# Altium PCB main.PcbDoc (part 2 of 2)
Units mm, origin at the board's own origin, x right, y up, seen from the top; angles counter-clockwise.
Board outline 97 x 82.5 mm, 4 copper layers (Top Layer, Ground Layer, Power Layer, Bottom Layer), stack 1.591 mm thick; 87 components, 68 nets, 365 pads, 232 vias.
Unrouted connection lines stored in the file: 2.
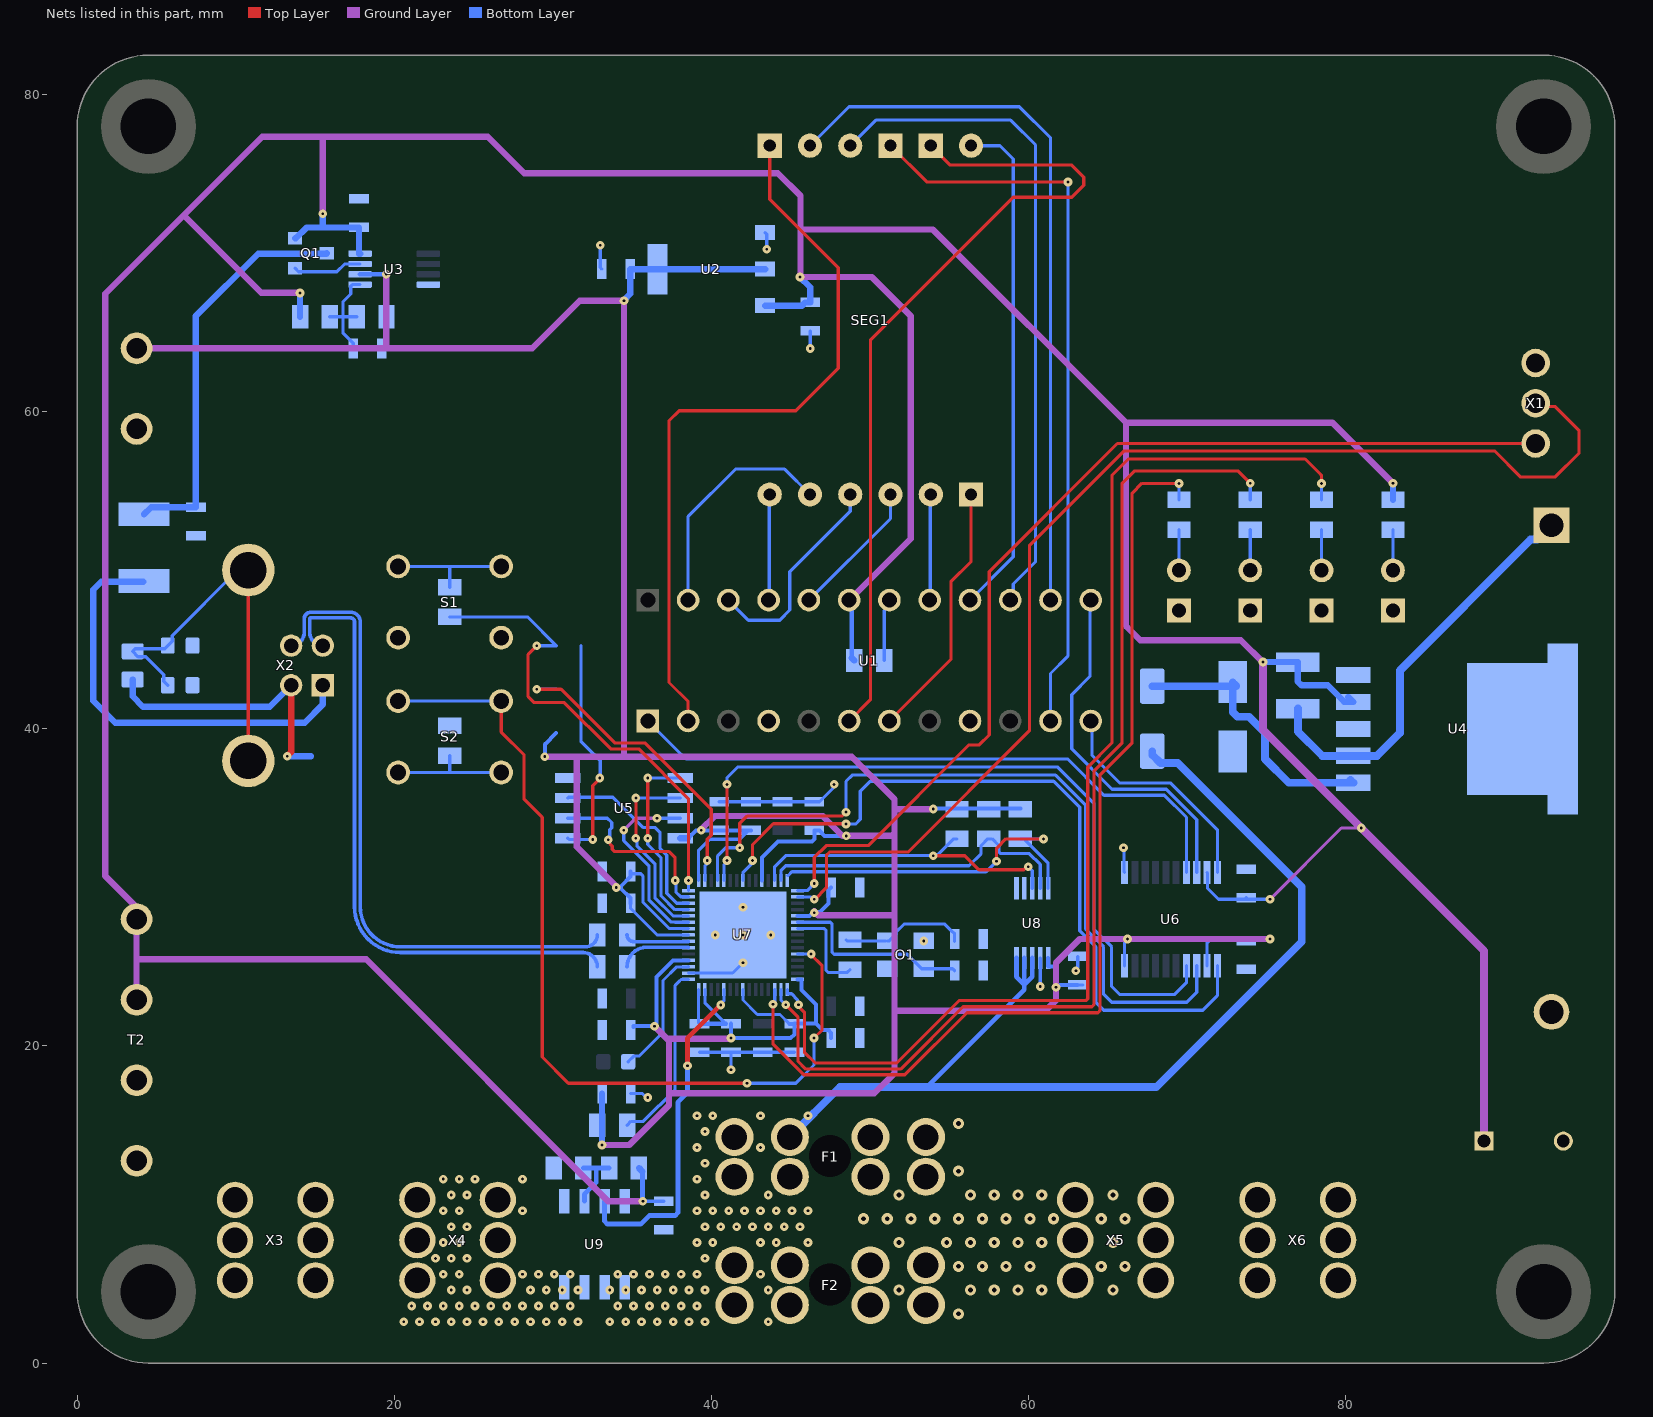
[diagram p4: the nets of this part, all layers, seen from the top]

## Via types
v1: diameter 0.55, hole 0.175, Top Layer to Bottom Layer, 193 vias
v2: diameter 0.7, hole 0.3, Top Layer to Bottom Layer, 39 vias

## Nets (pads, with @x,y where several pads share a name; then routed paths per layer and width w, separated by ;. In a path a pad name is that pad's centre, name@x,y a point inside that pad or via, vN(x,y) a via of type N, cw(c..) or ccw(c..) an arc to the next point about the centre after c; other vN are vias at no path point) (continued)
+3V3: C3.2 C8.2 C10.2 C11.2 C12.2 C14.2 C15.2 C17.1 C18.1 C22.2 C24.2 C25.1 C26.2 C27.2 C28.2 J3.1 R10.2 R11.2 R12.2 R16.2 T1.1 U2.2 U3.6 U5.8 U6.2 U6.10 U7.1 U7.11 U7.20 U7.30 U7.38 U7.44 U7.45 U7.49 U7.53 U7.54 U8.6 | length 290.9
  Ground Layer w0.4: T1.1@4.5,64 19.515,64 ; v1(19.5,68.675) 19.5,64.015 19.515,64 ; v1(29.5,38.25) 31.512,38.25 ; v1(33.11,13.75) 34.832,13.75 37.338,16.256 37.338,17.018 ; v1(34.01,30) 34.01,30.068 31.512,32.565 31.512,38.25 ; v1(36.422,21.249) 37.338,20.333 ; 37.338,20.447 37.338,17.018 ; 37.375,20.447 41.197,20.447 v1(41.25,20.5) ; v1@39.342,33.627 40.215,34.5 47.025,34.5 48.275,33.25 v1(48.514,33.25) 51.411,33.25 51.562,33.401 51.562,28.25 ; v1@46.491,28.491 46.732,28.25 51.562,28.25 ; 51.562,33.5 51.562,34.94 ; v1(54,34.94) 51.562,34.94 ; v1(75.25,26.75) v1(66.25,26.75) 63.25,26.75 61.75,25.25 v1(61.75,23.7) 61.75,22.888 61.087,22.225 51.562,22.225 ; 19.515,64 28.71,64 31.71,67 v1(34.5,67) 34.5,38.25 ; 31.512,38.25 34.5,38.25 ; 34.5,38.25 48.872,38.25 51.562,35.56 51.562,34.94 ; 37.338,17.018 50.292,17.018 51.562,18.288 51.562,22.225 ; 51.562,22.225 51.562,28.25
  Bottom Layer w0.2: C15.2@34.91,29 34.91,28.675 36.585,27 U7.53@38.56,27 ; C12.2@34.91,31 35.049,30.861 35.555,30.861 35.687,30.729 35.687,29.083 37.37,27.4 U7.54@38.56,27.4 ; C25.1@39.2,21.45 U7.45@39.2,23.56 ; U7.1@39.2,30.44 39.2,32.342 39.898,33.04 41.793,33.04 C10.2@42.353,33.6 ; U7.44@39.6,23.56 39.6,22.725 C24.2@40.925,21.4 ; U7.38@42,23.56 42,22.897 42.91,21.987 44.338,21.987 C22.2@44.93,21.395 ; C18.1@63.119,23.85 C18.1@63.444,23.85 ; U6.10@66.075,25.062 66.075,26.534 66.25,26.709 v1(66.25,26.75) ; U6.2@71.275,25.062 71.275,26.516 71.509,26.75 C17.1@73.734,26.75 ; C17.1@73.75,26.65 73.85,26.75 v1(75.25,26.75)
  Bottom Layer w0.25: U8.6@61.25,25.55 61.25,25.048 61.275,25.023 61.604,25.023 61.75,24.877 v1(61.75,23.7) 61.831,23.7 61.981,23.85 C18.1@63.119,23.85
  Bottom Layer w0.254: v1(29.5,38.25) 29.5,39.03 J3.1@30.22,39.75 ; v1(34.01,30) 34.067,29.943 34.292,29.943 34.91,29.325 C15.2@34.91,29 ; 34.292,30.057 34.91,30.675 C12.2@34.91,31 ; C26.2@35.083,21.205 35.083,21.249 v1(36.422,21.249) 36.422,21.329 36.536,21.443 36.536,24.344 37.592,25.4 U7.49@38.56,25.4 ; U5.8@38.525,33.095 39.031,33.6 v1(39.37,33.6) C11.2@40.5,33.6 C10.2@42.207,33.6 ; C25.1@39.25,21.4 C24.2@40.925,21.4 ; C24.2@41.25,21.4 v1(41.25,20.5) 45.011,20.5 45.245,20.734 45.245,21.395 C22.2@44.93,21.395 ; C10.2@42.034,33.427 C10.2@42.207,33.6 ; C10.2@42.5,33.6 42.353,33.6 C10.2@42.207,33.6 ; U7.11@43.2,30.44 43.2,31.897 44.196,32.893 46.351,32.893 46.5,33.042 C8.2@46.5,33.6 46.825,33.6 46.998,33.427 46.998,33.399 47.147,33.25 v1(48.514,33.25) ; C22.2@45.25,21.4 45.256,21.406 46.609,21.406 ; U7.30@45.44,24.2 45.684,24.2 45.701,24.183 45.701,23.514 46.609,22.606 46.609,21.406 ; U7.20@45.44,28.2 46.2,28.2 v1@46.491,28.491 ; v1(46.5,28.4) 46.552,28.452 46.867,28.452 47.392,28.977 47.392,29.827 C14.2@47.565,30 ; C27.2@47.565,20.5 47.565,20.825 47.392,20.998 47.017,20.998 46.609,21.406 ; v1@54,34.992 R10.2@59.5,34.992
  Bottom Layer w0.3: U3.6@17.85,68.675 v1(19.5,68.675)
  Bottom Layer w0.4: v1(33.11,13.75) C28.2@33.11,17 ; v1(34.5,67) 34.5,67.041 34.9,67.441 C3.2@34.9,69 U2.2@36.6,69 U2.2@43.4,69 ; U5.8@38.05,33.095 U5.8@38.525,33.095
+5V: C1.1 C2.2 C4.2 C13.1 C29.2 L2.2 Q1.2 R2.2 R3.1 R8.1 R17.2 T2.1 T2.2 U1.19 U2.3 U3.8 U4.4 U6.19 U9.8 | length 326.2
  Ground Layer w0.2: v1(75.25,29.25) 79.75,33.75 v1(81,33.75)
  Ground Layer w0.4: T2.2@3.75,22.92 3.75,25.46 ; T2.1@3.75,28 3.75,25.46 ; T2.1@4.5,28 1.778,30.722 1.778,67.437 6.731,72.39 ; v1(14.06,67.5) 11.621,67.5 6.731,72.39 ; v1(15.5,72.5) 15.5,77.222 15.621,77.343 ; v1(35.687,10.204) 33.484,10.204 18.228,25.46 3.75,25.46 ; v1(45.6,68.5) 50.118,68.5 52.578,66.04 52.578,51.998 U1.19@48.7,48.12 ; v1@45.627,68.527 45.627,71.501 ; v1@74.803,44.197 73.407,45.593 67.056,45.593 66.167,46.482 66.167,59.309 ; v1(83,55.5) 79.191,59.309 66.167,59.309 ; 6.731,72.39 11.684,77.343 15.621,77.343 ; 15.621,77.343 25.908,77.343 28.194,75.057 44.196,75.057 45.627,73.626 45.627,71.501 ; 45.627,71.501 53.975,71.501 66.167,59.309
  Ground Layer w0.5: v1(74.803,44.216) 74.803,39.947 v1(81,33.75) 88.75,26 C1.1@88.75,14
  Bottom Layer w0.2: v1(35.687,10.204) 36.996,10.204 C29.2@37,10.2 ; U6.19@71.275,30.938 71.3,30.913 71.3,29.95 72,29.25 C13.1@73.811,29.25 ; C13.1@73.75,29.35 73.85,29.25 v1(75.25,29.25)
  Bottom Layer w0.3: U9.8@34.544,10.204 v1(35.687,10.204) ; v1@35.658,10.233 R17.2@35.658,12.082 ; R8.1@48.865,44.474 U1.19@48.865,47.955
  Bottom Layer w0.4: Q1.2@13.75,70.95 13.8,70.95 14.478,71.628 15.4,71.628 ; R2.2@14.06,66 v1(14.06,67.5) ; v1(15.5,72.5) 15.5,71.728 15.4,71.628 ; U3.8@17.85,69.975 17.78,69.975 C2.2@17.78,71.628 15.4,71.628 ; R17.2@35.44,12.3 R17.2@35.658,12.082 ; U2.3@43.4,66.7 45.725,66.7 45.925,66.9 C4.2@46.25,66.9 46.25,67.85 v1(45.6,68.5) ; R8.1@48.865,44.474 R8.1@49.03,44.31 ; v1(74.803,44.216) L2.2@77,44.216 77,42.984 77.234,42.75 78.88,42.75 79.93,41.7 U4.4@80.5,41.7 U4.4@80.19,42.01 ; R3.1@83,54.44 v1(83,55.5)
Battery+: D6.2 F1.1 F2.1 U8.8 U8.9 U8.10 U9.1 U9.2 | length 68.5
  Bottom Layer w0.3: 53.53,17.335 53.594,17.399 59.75,23.555 59.75,23.876 ; U8.10@59.25,25.55 59.25,24.376 59.75,23.876 ; U8.9@59.75,25.55 59.75,23.876 ; U8.8@60.25,25.55 60.25,24.376 59.75,23.876
  Bottom Layer w0.5: F1.1@44.96,14.25 48.109,17.399 53.594,17.399 68.072,17.399 77.25,26.577 77.25,30.026 69.426,37.85 68.332,37.85 67.817,38.365 D6.2@67.817,38.59
  other v1: 33.6,2.6 34.6,2.6 35.6,2.6 36.6,2.6 37.6,2.6 38.6,2.6 39.6,2.6 43.6,2.6 34.1,3.6 35.1,3.6 36.1,3.6 37.1,3.6 38.1,3.6 39.1,3.6 33.6,4.6 34.6,4.6 35.6,4.6 36.6,4.6 37.6,4.6 38.6,4.6 39.6,4.6 43.6,4.6 34.1,5.6 35.1,5.6 36.1,5.6 37.1,5.6 38.1,5.6 39.1,5.6 43.1,5.6 39.6,6.6 39.1,7.6 40.1,7.6 43.1,7.6 44.1,7.6 46.1,7.6 39.6,8.6 40.6,8.6 41.6,8.6 42.6,8.6 43.6,8.6 44.6,8.6 45.6,8.6 39.1,9.6 40.1,9.6 41.1,9.6 42.1,9.6 43.1,9.6 44.1,9.6 45.1,9.6 46.1,9.6 39.6,10.6 43.6,10.6 39.1,11.6 39.6,12.6 39.1,13.6 43.1,13.6 39.6,14.6 39.1,15.6 40.1,15.6 43.1,15.6 46.1,15.6
"Current Sense": U7.41 U9.7 | length 21.5
  Top Layer w0.3: v1(38.5,18.75) 38.5,20.484 v1(40.6,22.584)
  Bottom Layer w0.2: v1@40.6,22.652 40.8,22.852 U7.41@40.8,23.56
  Bottom Layer w0.3: U9.7@33.274,10.204 33.274,8.939 33.45,8.763 35.56,8.763 36.097,9.3 37.724,9.3 37.9,9.476 37.9,16.437 38.5,17.037 v1(38.5,18.75)
D_DIG_0: SEG1.12 U1.2 | length 47.3
  Top Layer w0.2: U1.2@38.54,40.5 38.54,41.724 37.338,42.926 37.338,59.436 37.973,60.071 45.339,60.071 48.006,62.738 48.006,69.089 43.688,73.407 SEG1.12@43.688,76.786
D_DIG_1: SEG1.9 U1.11 | length 46.6
  Top Layer w0.203: SEG1.9@51.308,76.786 53.594,74.5 v1(62.5,74.5)
  Bottom Layer w0.203: U1.11@61.4,40.5 61.4,43.493 62.5,44.593 v1(62.5,74.5)
D_DIG_2: SEG1.8 U1.6 | length 53.2
  Top Layer w0.2: U1.6@48.7,40.5 50.038,41.838 50.038,64.516 59.055,73.533 62.738,73.533 63.5,74.295 63.5,74.803 62.738,75.565 55.069,75.565 SEG1.8@53.848,76.786
  Bottom Layer w0.203: SEG1.8@53.848,76.786 SEG1.8@53.975,76.659
D_DIG_3: SEG1.6 U1.7 | length 16.4
  Top Layer w0.2: U1.7@51.24,40.5 55.118,44.378 55.118,49.276 56.388,50.546 SEG1.6@56.388,54.786
D_ISET: R8.2 U1.18 | length 3.9
  Bottom Layer w0.203: R8.2@50.91,44.31 50.91,47.459 51.24,47.789 U1.18@51.24,48.12
"D_LOAD (C\S\\)": U6.1 U7.8 | length 49.2
  Top Layer w0.203: v1(42.6,31.7) 42.6,32.694 43.921,34.015 48.48,34.015 v1@48.498,33.998
  Bottom Layer w0.203: U7.8@42,30.44 42.008,30.448 42.008,30.959 v1@42.547,31.498 ; v1(48.5,34) 49.113,34 49.403,34.29 49.403,36.068 50.038,36.703 61.595,36.703 63.246,35.052 63.246,27.254 64.25,26.25 64.25,22.75 64.75,22.25 71,22.25 71.925,23.175 U6.1@71.925,25.062
"D_LOAD (C\S\\) 5V": U1.12 U6.20 | length 14.7
  Bottom Layer w0.2: U1.12@63.94,40.5 64.008,40.432 64.008,38.354 65.786,36.576 68.987,36.576 71.925,33.638 U6.20@71.925,30.938
D_N: R15.2 X2.2 Z2.2 | length 40.6
  Bottom Layer w0.23: X2.2@15.5,45.25 cw(c15.5,46.071) 14.679,46.071 14.679,46.929 cw(c14.75,46.929) 14.75,47 17.25,47 cw(c17.25,46.75) 17.5,46.75 17.5,28.79 ccw(c20.397,28.79) 20.397,25.893 31.917,25.893 cw(c31.917,25) R15.2@32.81,25
D_P: R13.2 X2.3 Z1.2 | length 41.1
  Bottom Layer w0.23: X2.3@13.5,45.25 ccw(c13.5,46.071) 14.321,46.071 14.321,46.929 cw(c14.75,46.929) 14.75,47.357 17.25,47.357 cw(c17.25,46.75) 17.857,46.75 17.857,28.79 ccw(c20.397,28.79) 20.397,26.25 32.06,26.25 ccw(c32.06,27) R13.2@32.81,27
D_Seg_A: SEG1.11 U1.14 | length 46.2
  Bottom Layer w0.203: SEG1.11@46.228,76.786 48.69,79.248 59.436,79.248 61.4,77.284 U1.14@61.4,48.12
D_Seg_B: SEG1.7 U1.16 | length 32
  Bottom Layer w0.203: U1.16@56.32,48.12 59.055,50.855 59.055,75.946 58.215,76.786 SEG1.7@56.388,76.786
D_Seg_C: SEG1.4 U1.20 | length 8.8
  Bottom Layer w0.203: U1.20@46.16,48.12 51.308,53.268 SEG1.4@51.308,54.786
D_Seg_D: SEG1.2 U1.23 | length 14.9
  Bottom Layer w0.203: U1.23@38.54,48.12 38.54,53.399 41.529,56.388 44.626,56.388 SEG1.2@46.228,54.786
D_Seg_DP: SEG1.3 U1.22 | length 13.5
  Bottom Layer w0.203: U1.22@41.08,48.12 42.345,46.855 44.315,46.855 44.958,47.498 44.958,49.911 48.766,53.719 48.766,54.784 SEG1.3@48.768,54.786
D_Seg_E: SEG1.1 U1.21 | length 6.7
  Bottom Layer w0.203: U1.21@43.62,48.12 43.654,48.154 43.654,54.752 SEG1.1@43.688,54.786
D_Seg_F: SEG1.10 U1.15 | length 42.4
  Bottom Layer w0.203: SEG1.10@48.768,76.786 50.384,78.402 58.885,78.402 60.452,76.835 60.452,50.546 59.043,49.137 59.043,48.303 U1.15@58.86,48.12
D_Seg_G: SEG1.5 U1.17 | length 6.7
  Bottom Layer w0.203: U1.17@53.78,48.12 53.814,48.154 53.814,54.752 SEG1.5@53.848,54.786
DX_N: R15.1 U7.51 | length 4.6
  Bottom Layer w0.23: R15.1@34.69,25 cw(c35.911,25) 35.911,26.221 38.539,26.221 cw(c38.539,26.2) U7.51@38.56,26.2
DX_P: R13.1 U7.52 | length 4.1
  Bottom Layer w0.23: R13.1@34.69,27 ccw(c35.112,27) 35.112,26.579 38.539,26.579 ccw(c38.539,26.6) U7.52@38.56,26.6
"Flash SS": J1.2 J2.2 J3.2 U5.1 | length 14.5
  Top Layer w0.203: v1(32.52,33.02) 32.52,36.421 32.963,36.864 v1(32.963,36.905)
  Bottom Layer w0.203: U5.1@30.95,33.095 31.025,33.02 v1(32.52,33.02) ; J1.2@31.78,45.25 J2.2@31.78,42.5 J3.2@31.78,39.75 31.78,39.22 33,38 33,36.942 v1(32.963,36.905)
GND: C1.2 C2.1 C3.1 C4.1 C5.1 C6.2 C7.2 C8.1 C9.1 C10.1 C11.1 C12.1 C13.2 C14.1 C15.1 C16.1 C17.2 C18.2 C19.1 C20.1 C21.1 C22.1 C23.1 C24.1 C25.2 C26.1 C27.1 C28.1 C29.1 D1.2 D2.2 D3.2 D4.2 D5.2 J4.1 O1.2 O1.4 R1.1 R9.2 R18.1 S1.3 S1.4 T1.2 T2.3 T2.4 U1.4 U1.9 U2.1 U3.4 U4.3 U4.5 U4.6 U5.4 U6.11 U7.47 U7.61 U8.1 U8.2 U8.7 U9.5 X1.3 X3.1 X6.1 | length 27.9
  Bottom Layer w0.2: v1(33,70.5) 33,69.1 C3.1@33.1,69 ; C28.1@34.91,17 35.655,17 35.905,16.75 v1(36,16.75) ; U7.47@38.56,24.6 41.35,24.6 v1(42,25.25) ; C25.2@39.25,19.6 C24.1@41.25,19.6 ; C11.1@40.5,35.4 C10.1@42.5,35.4 C9.1@44.5,35.4 C8.1@46.5,35.4 46.825,35.4 47.683,36.258 47.683,36.433 v1(47.75,36.5) ; v1(41.25,18.5) C24.1@41.25,19.6 ; U2.1@43.4,71.3 43.5,71.2 v1(43.5,70.25) ; C22.1@45.25,19.6 C23.1@43.25,19.6 C24.1@41.25,19.6 ; v1(46.25,64) C4.1@46.25,65.1 ; v1(60.75,23.75) U8.7@60.75,25.55 ; v1(63,24.75) 63,24.845 63.119,24.964 C18.2@63.119,25.65 ; v1(66,32.5) 66.037,32.463 66.037,30.976 U6.11@66.075,30.938
  other v1: 53.4,26.625 40.25,27 42,27 43.75,27 42,28.75
GPIO0: J2.1 U7.2 | length 19.8
  Top Layer w0.203: v1(29,42.5) 30.525,42.5 33.909,39.116 35.814,39.116 40,34.93 40,33.287 39.751,33.038 v1(39.751,31.7)
  Bottom Layer w0.203: v1(29,42.5) J2.1@30.22,42.5 ; U7.2@39.6,30.44 39.6,31.349 v1@39.751,31.5
"Green LED": R4.1 U7.31 | length 73.7
  Top Layer w0.203: v1@45.4,22.6 45.875,22.125 45.875,19.6 46.552,18.923 51.689,18.923 55.626,22.86 63.635,22.86 63.754,22.979 63.754,37.592 65.278,39.116 65.278,56.007 66.294,57.023 77.456,57.023 78.367,56.112 78.5,55.979 v1(78.5,55.485)
  Bottom Layer w0.2: R4.1@78.5,54.44 v1(78.5,55.485)
  Bottom Layer w0.203: U7.31@44.808,23.552 44.808,23.293 45.067,23.293 45.434,22.926 45.434,22.666 v1(45.5,22.6)
LM2576_OUTPUT: D1.1 L2.1 U4.2 | length 26.4
  Bottom Layer w0.203: D1.1@92.088,51.938 D1.1@93,52.85
  Bottom Layer w0.5: L2.1@77,41.284 77,39.84 78.54,38.3 U4.2@80.5,38.3 81.988,38.3 83.439,39.751 83.439,43.688 91.689,51.938 D1.1@92.088,51.938
LM2576_VIN: C7.1 D6.1 U4.1 | length 17.4
  Bottom Layer w0.5: D6.1@67.817,42.69 C7.1@72.62,42.69 ; C7.1@72.897,42.699 72.897,41.06 73.19,40.767 73.914,40.767 74.93,39.751 74.93,38.1 76.43,36.6 U4.1@80.5,36.6 U4.1@80.313,36.787 ; C7.1@72.897,42.917 73.006,42.808 C7.1@73.115,42.699
Load+: U9.3 U9.4 X4.1
  other v1: 20.6,2.6 21.6,2.6 22.6,2.6 23.6,2.6 24.6,2.6 25.6,2.6 26.6,2.6 27.6,2.6 28.6,2.6 29.6,2.6 30.6,2.6 31.6,2.6 21.1,3.6 22.1,3.6 23.1,3.6 24.1,3.6 25.1,3.6 26.1,3.6 27.1,3.6 28.1,3.6 29.1,3.6 30.1,3.6 31.1,3.6 23.6,4.6 24.6,4.6 28.6,4.6 29.6,4.6 30.6,4.6 31.6,4.6 23.1,5.6 24.1,5.6 28.1,5.6 29.1,5.6 30.1,5.6 31.1,5.6 22.6,6.6 23.6,6.6 24.6,6.6 23.1,7.6 24.1,7.6 23.6,8.6 24.6,8.6 23.1,9.6 24.1,9.6 28.1,9.6 23.6,10.6 24.6,10.6 23.1,11.6 24.1,11.6 25.1,11.6 28.1,11.6
MOSI1: U6.4 U7.5 | length 49.3
  Top Layer w0.203: v1(40.994,31.7) v1(40.994,36.5)
  Bottom Layer w0.203: U7.5@40.808,30.448 U7.5@40.8,30.44 40.8,31.412 40.994,31.606 v1(40.994,31.7) ; v1(40.994,36.5) 40.994,36.93 41.656,37.592 61.857,37.592 64.135,35.314 64.135,27.365 65.25,26.25 65.25,23.75 65.75,23.25 69.25,23.25 69.975,23.975 U6.4@69.975,25.062
"MOSI1 5V": U1.1 U6.17 | length 40
  Bottom Layer w0.2: U1.1@36,40.5 38.4,38.1 62.484,38.1 64.77,35.814 68.58,35.814 69.975,34.419 U6.17@69.975,30.938
NetC16_2: C16.2 O1.3 R14.2 | length 8
  Bottom Layer w0.203: R14.2@48.5,26.69 48.565,26.625 50.85,26.625 O1.3@50.975,26.625 ; O1.3@51.1,26.625 51.225,26.625 51.649,27.049 51.649,27.174 52.161,27.686 54.728,27.686 55.141,27.273 55.152,27.273 55.35,27.075 C16.2@55.35,26.597
NetD2_1: D2.1 R6.2 | length 2.6
  Bottom Layer w0.203: D2.1@69.5,50 R6.2@69.5,52.56
NetD3_1: D3.1 R5.2 | length 2.6
  Bottom Layer w0.203: D3.1@74,50 R5.2@74,52.56
NetD4_1: D4.1 R4.2 | length 2.6
  Bottom Layer w0.203: D4.1@78.5,50 R4.2@78.5,52.56
NetD5_1: D5.1 R3.2 | length 2.6
  Bottom Layer w0.203: D5.1@83,50 R3.2@83,52.56
NetF1_2: F1.2 F2.2 X5.1
  other v2: 55.6,3.1 51.85,4.6 56.35,4.6 57.85,4.6 59.35,4.6 60.85,4.6 65.35,4.6 55.6,6.1 57.1,6.1 58.6,6.1 60.1,6.1 64.6,6.1 66.1,6.1 51.85,7.6 54.85,7.6 56.35,7.6 57.85,7.6 59.35,7.6 60.85,7.6 65.35,7.6 49.6,9.1 51.1,9.1 52.6,9.1 54.1,9.1 55.6,9.1 57.1,9.1 58.6,9.1 60.1,9.1 61.6,9.1 64.6,9.1 66.1,9.1 51.85,10.6 56.35,10.6 57.85,10.6 59.35,10.6 60.85,10.6 65.35,10.6 55.6,12.1 55.6,15.1
NetF3_1: F3.1 X2.1 | length 27.1
  Bottom Layer w0.4: F3.1@4.164,49.276 1.524,49.276 1.016,48.768 1.016,41.783 2.413,40.386 14.351,40.386 15.5,41.535 X2.1@15.5,42.75
NetL1_1: L1.1 X2.S1 X2.S2 Z1.1 Z2.1 | length 24.8
  Top Layer w0.203: X2.S2@10.8,37.98 X2.S1@10.8,50.02
  Bottom Layer w0.203: Z2.1@5.72,42.75 5.47,43 5.47,43.425 4.341,44.554 3.835,44.554 L1.1@3.5,44.889 3.67,45.059 5.529,45.059 5.999,45.529 5.999,45.877 10.142,50.02 X2.S1@10.55,50.02
NetR9_1: R9.1 S2.3 S2.4 | length 7.6
  Bottom Layer w0.203: S2.3@20.25,37.25 23.5,37.25 ; R9.1@23.5,38.31 23.5,37.25 ; S2.4@26.75,37.25 23.5,37.25
NetR17_1: R17.1 R18.2 U9.6 | length 4
  Bottom Layer w0.3: R18.2@31.94,12.3 32.75,12.3 ; U9.6@32.004,10.204 32.004,10.643 32.75,11.389 32.75,12.3 ; R17.1@33.56,12.3 32.75,12.3
"Op B (+) Input": C5.2 R1.2 R2.1 U3.5 | length 6.7
  Bottom Layer w0.203: R2.1@15.94,66 16.764,66 ; C5.2@17.415,64 17.415,64.325 16.764,64.976 16.764,66 ; R1.2@17.635,66 16.764,66 ; U3.5@17.85,68.025 17.365,68.025 17.267,67.927 17.267,67.432 16.764,66.929 16.764,66
"Op B Output": Q1.1 U3.7 | length 4.4
  Bottom Layer w0.203: Q1.1@13.75,69.05 13.966,68.834 16.383,68.834 16.874,69.325 U3.7@17.85,69.325
QSPI_SCLK: U5.6 U7.56 | length 12.1
  Top Layer w0.203: v1@35.246,33.097 v1(35.246,35.635)
  Bottom Layer w0.203: v1@35.246,33.097 35.313,33.03 35.313,32.632 36.449,31.496 36.449,29.346 37.598,28.197 37.79,28.197 37.793,28.2 ; v1(35.246,35.635) U5.6@38.05,35.635 ; 37.84,28.2 U7.56@38.56,28.2
  other v1: 35.241,33.097
QSPI_SD0: U5.5 U7.57 | length 11.9
  Top Layer w0.203: v1(36,33.097) v1(36,36.905)
  Bottom Layer w0.203: v1(36,33.097) 36,32.707 36.83,31.877 36.83,29.479 37.709,28.6 U7.57@38.56,28.6 ; v1(36,36.905) U5.5@38.05,36.905
QSPI_SD1: U5.2 U7.59 | length 12.1
  Top Layer w0.203: v1(33.5,33) 33.5,32.866 33.762,32.604 33.762,32.402 33.906,32.258 37.338,32.258 37.721,31.875 37.721,30.449 v1(37.73,30.44)
  Bottom Layer w0.203: U5.2@30.95,34.365 33.453,34.365 33.722,34.096 33.722,33.763 33.595,33.636 33.595,33.095 v1(33.5,33) ; v1(37.73,30.44) 37.769,30.4 37.769,29.712 38.073,29.408 38.552,29.408 U7.59@38.56,29.4
QSPI_SD2: U5.3 U7.58 | length 12.4
  Bottom Layer w0.203: U5.3@30.95,35.635 31.003,35.687 33.782,35.687 35.687,33.782 36.449,33.782 36.772,33.459 36.772,32.448 37.193,32.027 37.193,29.629 37.822,29 U7.58@38.56,29
QSPI_SD3: U5.7 U7.55 | length 12
  Ground Layer w0.203: v1(34.481,33.6) 35.246,34.365 v1(36.576,34.365)
  Bottom Layer w0.203: v1(34.481,33.6) 34.481,32.956 36.068,31.369 36.068,29.213 37.468,27.813 37.719,27.813 37.732,27.8 U7.55@38.56,27.8 ; v1(36.576,34.365) U5.7@38.05,34.365
QSPI_SS: J1.1 R7.2 U7.60 | length 30.6
  Top Layer w0.203: v1(29,45.25) 28.448,44.698 28.448,42.037 28.829,41.656 30.734,41.656 33.655,38.735 35.42,38.735 38.56,35.595 v1@38.56,30.5
  Bottom Layer w0.203: R7.2@23.5,47.06 28.41,47.06 J1.1@30.22,45.25 v1(29,45.25) ; U7.60@38.56,29.8 v1(38.56,30.44)
"Red LED": R6.1 U7.33 | length 64.3
  Top Layer w0.203: v1@43.902,22.595 43.9,22.593 43.9,20.102 45.824,18.179 52.215,18.179 56.134,22.098 64.397,22.098 64.516,22.217 64.516,37.084 66.548,39.116 66.548,54.864 67.169,55.485 v1(69.5,55.485)
  Bottom Layer w0.2: R6.1@69.5,54.44 v1(69.5,55.485)
  Bottom Layer w0.203: v1(43.9,22.627) 43.9,22.721 44,22.821 U7.33@44,23.56
RUN: S2.1 S2.2 U7.26 | length 56.7
  Top Layer w0.203: S2.2@26.75,41.75 26.75,39.798 28.194,38.354 28.194,35.56 29.337,34.417 29.337,19.304 30.988,17.653 v1(42.25,17.653) ; v1@46.25,25.8 46.99,25.06 46.99,21.008 v1(46.482,20.5)
  Bottom Layer w0.203: S2.1@20.25,41.75 S2.2@26.75,41.75 ; v1(42.25,17.653) 45.339,17.653 46.482,18.796 v1(46.482,20.5) ; U7.26@45.44,25.8 v1@46.25,25.8
  other v1: 46.3,25.8
RXD1: U7.17 X1.2 | length 75.3
  Top Layer w0.203: v1@46.519,29.231 47.265,29.977 47.265,32.025 47.476,32.236 52.428,32.236 60.071,39.879 60.071,51.562 66.04,57.531 89.408,57.531 91.059,55.88 93.218,55.88 94.742,57.404 94.742,58.801 93.205,60.338 92.202,60.338 X1.2@92,60.54
  Bottom Layer w0.203: U7.17@45.44,29.4 46.256,29.4 46.468,29.188 v1@46.524,29.188
  other v1: 46.5,29.25
SCK1: U6.3 U7.4 | length 50.1
  Top Layer w0.203: v1(41.8,32.5) 41.8,34.053 42.247,34.5 48.25,34.5 v1(48.5,34.75)
  Bottom Layer w0.203: U7.4@40.4,30.44 40.4,31.99 40.91,32.5 v1(41.8,32.5) ; v1(48.5,34.75) 48.5,36.689 48.895,37.084 61.722,37.084 63.627,35.179 63.627,27.373 64.75,26.25 64.75,23.25 65.25,22.75 70,22.75 70.625,23.375 U6.3@70.625,25.062
"SCK1 5V": U1.13 U6.18 | length 23.3
  Top Layer w0.2: U1.13@63.706,47.885 U1.13@63.94,48.12
  Bottom Layer w0.2: U1.13@63.94,48.12 63.881,48.061 63.881,43.307 62.738,42.164 62.738,38.735 65.278,36.195 68.707,36.195 70.625,34.277 U6.18@70.625,30.938
SCL: R10.1 U7.15 U8.5 | length 22.8
  Top Layer w0.203: v1(58,31.65) 58,32.473 58.587,33.06 v1(60.96,33.06)
  Bottom Layer w0.203: U7.15@44.808,30.753 44.855,30.753 45.09,30.988 57.338,30.988 v1(58,31.65) ; R10.1@59.5,33.06 R10.1@59.715,33.06 ; v1(60.96,33.06) R10.1@59.715,33.06 ; U8.5@61.25,29.95 61.25,31.525 R10.1@59.715,33.06
SDA: R11.1 U7.14 U8.4 | length 20.4
  Bottom Layer w0.203: U7.14@44.4,30.44 44.408,30.448 44.408,31.081 44.696,31.369 56.261,31.369 57.023,32.131 57.023,32.642 R11.1@57.441,33.06 ; R11.1@57.5,33.06 57.713,33.06 58.131,32.642 58.131,32.25 58.25,32.131 60.071,32.131 60.75,31.452 U8.4@60.75,29.95
TXD1: U7.16 X1.1 | length 65.2
  Top Layer w0.203: v1(46.5,30.25) 46.5,31.895 47.244,32.639 49.911,32.639 56.261,38.989 56.904,38.989 57.531,39.616 57.531,49.911 65.62,58 X1.1@92,58
  Bottom Layer w0.203: U7.16@45.44,29.8 46.05,29.8 v1(46.5,30.25)
U\S\B\_\B\O\O\T\: R7.1 S1.1 S1.2 | length 7.8
  Bottom Layer w0.203: S1.1@20.25,50.25 23.5,50.25 ; R7.1@23.5,48.94 23.5,50.25 ; S1.2@26.75,50.25 23.5,50.25
USBGND: J4.2 L1.2 X2.4 | length 18
  Top Layer w0.4: v1(13.25,38.28) 13.25,38.289 13.5,38.539 X2.4@13.5,42.75
  Bottom Layer w0.4: L1.2@3.5,43.111 3.5,42.053 4.151,41.402 12.152,41.402 X2.4@13.5,42.75 ; v1(13.25,38.28) J4.2@14.75,38.28
USBVCC: C6.1 F3.2 Q1.3 | length 25.4
  Bottom Layer w0.4: F3.2@4.223,53.535 4.673,53.985 C6.1@7.493,53.985 7.493,66.04 11.43,69.977 15.727,69.977 Q1.3@15.75,70
Voltage_Alert: R12.1 U7.13 U8.3 | length 21
  Top Layer w0.2: v1(54,32) 56,32 56.885,31.115 59.72,31.115 59.905,31.3 v1(60,31.3)
  Bottom Layer w0.2: U7.13@44,30.44 44,31.3 44.704,32.004 v1@54,32.004 ; v1(54,32) 54.067,32.067 54.292,32.067 55.285,33.06 R12.1@55.5,33.06 ; v1(60,31.3) 60.25,31.05 U8.3@60.25,29.95
VREG_AVDD: R16.1 U7.46 | length 11.5
  Bottom Layer w0.203: R16.1@34.69,15 34.93,15.24 35.715,15.24 37.719,17.244 37.719,23.819 37.973,24.073 38.092,24.192 38.552,24.192 U7.46@38.56,24.2
VREG_LX: L3.2 U7.48 | length 8.2
  Bottom Layer w0.2: 35.472,19.363 35.472,19.383 36.957,20.868 36.957,24.13 37.817,24.99 38.55,24.99 U7.48@38.552,24.992
  Bottom Layer w0.203: L3.2@34.76,19 34.76,19.017 35.106,19.363 35.472,19.363
XIN: C19.2 O1.1 U7.21 | length 12.2
  Bottom Layer w0.203: U7.21@45.44,27.8 47.506,27.8 47.625,27.681 47.625,25.9 47.744,25.781 52.37,25.781 53.275,24.875 O1.1@53.4,24.875 55.225,24.875 C19.2@55.35,24.75
XOUT: R14.1 U7.22 | length 6
  Bottom Layer w0.203: U7.22@45.44,27.4 47.125,27.4 47.244,27.281 47.244,24.757 47.363,24.638 48.578,24.638 R14.1@48.75,24.81
"Yellow LED": R5.1 U7.32 | length 68.9
  Top Layer w0.203: v1(44.7,22.6) 45.466,21.834 45.466,19.05 45.974,18.542 51.943,18.542 55.88,22.479 64.016,22.479 64.135,22.598 64.135,37.338 65.913,39.116 65.913,55.499 66.675,56.261 73.239,56.261 v1(74,55.5)
  Bottom Layer w0.2: R5.1@74,54.44 v1(74,55.5)
  Bottom Layer w0.203: U7.32@44.4,23.56 44.4,22.879 44.667,22.613 v1@44.667,22.6
pads on no net: F1. F2. U1.3 U1.5 U1.8 U1.10 U1.24 U3.1 U3.2 U3.3 U6.5 U6.6 U6.7 U6.8 U6.9 U6.12 U6.13 U6.14 U6.15 U6.16 U7.3 U7.7 U7.9 U7.10 U7.12 U7.18 U7.19 U7.24 U7.25 U7.27 U7.28 U7.29 U7.34 U7.35 U7.36 U7.37 U7.40 U7.42 U7.43
copper on no net:
  other v1: 50.25,23.75

## Polygon pours and split planes (outlines as drawn)
GND on Bottom Layer "NONET_L01_P-001" (hatched 45Degree grid 0.508 track 0.203, remove dead copper, pour order 33): 92.5,82.5 4.5,82.5 ccw(c4.5,78) 0,78 0,4.5 ccw(c4.5,4.5) 4.5,0 92.5,0 ccw(c92.5,4.5) 97,4.5 97,78 ccw(c92.5,78)
NetF1_2 on Bottom Layer "NONET_L01_P-001" (solid, remove dead copper, pour order 23): 48,16.4 56.5,16.4 56.5,12.29 70.04,12.29 70.04,3.21 56.5,3.21 56.5,1.5 48,1.5
Load+ on Bottom Layer "NONET_L01_P-001" (solid, remove dead copper, pour order 18): 32.4,6.25 28.75,6.25 28.75,12.29 19.5,12.29 19.5,1.5 32.4,1.5
Battery+ on Bottom Layer "NONET_L01_P-001" (solid, remove dead copper, pour order 22): 32.8,6.25 32.8,1.5 47,1.5 47,16.4 38.5,16.4 38.5,6.25
GND on Top Layer "NONET_L01_P-001" (hatched 45Degree grid 0.508 track 0.203, remove dead copper, pour order 32): 92.5,82.5 4.5,82.5 ccw(c4.5,78) 0,78 0,4.5 ccw(c4.5,4.5) 4.5,0 92.5,0 ccw(c92.5,4.5) 97,4.5 97,78 ccw(c92.5,78)
Load+ on Top Layer "NONET_L01_P-001" (solid, remove dead copper, pour order 27): 28.75,12.29 19.5,12.29 19.5,1.5 32.4,1.5 32.4,6.25 28.75,6.25
NetF1_2 on Top Layer "NONET_L01_P-001" (solid, remove dead copper, pour order 26): 56.5,16.4 48,16.4 48,1.5 56.5,1.5 56.5,3.21 70.04,3.21 70.04,12.29 56.5,12.29
Battery+ on Top Layer "NONET_L01_P-001" (solid, remove dead copper, pour order 19): 47,16.4 38.5,16.4 38.5,6.25 32.8,6.25 32.8,1.5 47,1.5
GND on Ground Layer "NONET_L01_P-001" (solid, pour order 31): 97,9 88,9 88,0 70.5,0 70.5,13.5 57.25,13.5 57.25,17 37.75,17 37.75,7 29.5,7 29.5,13.5 18.5,13.5 18.5,0 9,0 9,9 0,9 0,73.5 9,73.5 9,82.5 88,82.5 88,73.5 97,73.5
Load+ on Ground Layer "NONET_L01_P-001" (solid, remove dead copper, pour order 28): 28.75,12.29 19.5,12.29 19.5,1.5 32.4,1.5 32.4,6.25 28.75,6.25
NetF1_2 on Ground Layer "NONET_L01_P-001" (solid, remove dead copper, pour order 25): 70.04,12.29 70.04,3.21 56.5,3.21 56.5,1.5 48,1.5 48,16.4 56.5,16.4 56.5,12.29
Battery+ on Ground Layer "NONET_L01_P-001" (solid, remove dead copper, pour order 20): 47,1.5 32.8,1.5 32.8,6.25 38.5,6.25 38.5,16.4 47,16.4
GND on Power Layer "NONET_L01_P-001" (solid, pour order 30): 97,73.5 88,73.5 88,82.5 9,82.5 9,73.5 0,73.5 0,9 9,9 9,0 18.5,0 18.5,13.5 29.5,13.5 29.5,7 37.75,7 37.75,17 57.25,17 57.25,13.5 70.5,13.5 70.5,0 88,0 88,9 97,9
Load+ on Power Layer "NONET_L01_P-001" (solid, remove dead copper, pour order 29): 28.75,12.29 19.5,12.29 19.5,1.5 32.4,1.5 32.4,6.25 28.75,6.25
NetF1_2 on Power Layer "NONET_L01_P-001" (solid, remove dead copper, pour order 24): 70.04,12.29 70.04,3.21 56.5,3.21 56.5,1.5 48,1.5 48,16.4 56.5,16.4 56.5,12.29
Battery+ on Power Layer "NONET_L01_P-001" (solid, remove dead copper, pour order 21): 47,16.4 38.5,16.4 38.5,6.25 32.8,6.25 32.8,1.5 47,1.5
Load+ on Top Solder "NONET_L01_P-001" (solid, remove dead copper): 32.4,6.25 32.4,1.5 19.5,1.5 19.5,12.29 28.75,12.29 28.75,6.25
Battery+ on Top Solder "NONET_L01_P-001" (solid, remove dead copper): 47,16.4 38.5,16.4 38.5,6.25 32.8,6.25 32.8,1.5 47,1.5
NetF1_2 on Top Solder "NONET_L01_P-001" (solid, remove dead copper): 56.5,16.4 48,16.4 48,1.5 56.5,1.5 56.5,3.21 70.04,3.21 70.04,12.29 56.5,12.29
NetF1_2 on Bottom Solder "NONET_L01_P-001" (solid, remove dead copper): 56.5,16.4 48,16.4 48,1.5 56.5,1.5 56.5,3.21 70.04,3.21 70.04,12.29 56.5,12.29
Battery+ on Bottom Solder "NONET_L01_P-001" (solid, remove dead copper): 47,16.4 38.5,16.4 38.5,6.25 32.8,6.25 32.8,1.5 47,1.5
Load+ on Bottom Solder "NONET_L01_P-001" (solid, remove dead copper): 28.75,12.29 19.5,12.29 19.5,1.5 32.4,1.5 32.4,6.25 28.75,6.25

## Keep-outs
Keep-Out Layer:
  the board outline again, w0.254

## Other copper
Top Layer:
  pour cut-out: 4.5,73.5 ccw(c4.5,78) 9,78 ccw(c4.5,78) 4.5,82.5 ccw(c4.5,78) 0,78 ccw(c4.5,78)
  pour cut-out: 4.5,0 ccw(c4.5,4.5) 9,4.5 ccw(c4.5,4.5) 4.5,9 ccw(c4.5,4.5) 0,4.5 ccw(c4.5,4.5)
  pour cut-out: 92.5,0 ccw(c92.5,4.5) 97,4.5 ccw(c92.5,4.5) 92.5,9 ccw(c92.5,4.5) 88,4.5 ccw(c92.5,4.5)
  pour cut-out: 92.5,73.5 ccw(c92.5,78) 97,78 ccw(c92.5,78) 92.5,82.5 ccw(c92.5,78) 88,78 ccw(c92.5,78)
Bottom Layer:
  pour cut-out: 4.5,73.5 ccw(c4.5,78) 9,78 ccw(c4.5,78) 4.5,82.5 ccw(c4.5,78) 0,78 ccw(c4.5,78)
  pour cut-out: 4.5,0 ccw(c4.5,4.5) 9,4.5 ccw(c4.5,4.5) 4.5,9 ccw(c4.5,4.5) 0,4.5 ccw(c4.5,4.5)
  pour cut-out: 92.5,0 ccw(c92.5,4.5) 97,4.5 ccw(c92.5,4.5) 92.5,9 ccw(c92.5,4.5) 88,4.5 ccw(c92.5,4.5)
  pour cut-out: 92.5,73.5 ccw(c92.5,78) 97,78 ccw(c92.5,78) 92.5,82.5 ccw(c92.5,78) 88,78 ccw(c92.5,78)
Multi-Layer:
  pour cut-out: 48,16.4 47,16.4 47,14.434 48,14.434
  pour cut-out: 47,1.5 48,1.5 48,3.566 47,3.566

## Silkscreen, mask and mechanical layers (free items; w line width, h text height)
Top Overlay:
  drawing of 16 lines, arcs and shapes, not listed
  text "Voltage" at 26.598,79.917 h1.75
  text "Current" at 62.398,79.625 h1.75
  text "+3V3" at 4.301,67.3 h1.2
  text "UART" at 89.05,66.15 h1.2
  text "Boot" at 28.3,49.65 h1.2
  text "On" at 83.6,43.451 h1.2 r90
  text "Run" at 28.3,41.15 h1.2
  text "Okay" at 78.9,41.051 h1.2 r90
  text "Error" at 70.1,40.052 h1.2 r90
  text "Warning" at 74.4,37.653 h1.2 r90
  text "+5V" at 5.501,31.1 h1.2
  text "Battery" at 51.55,31.017 h1.4
  text "Max Current" at 70.052,30.5 h1.2
  text "Monitor" at 51.55,28.55 h1.4
  text "RADM" at 51.55,25.55 h1.2
  text "80A" at 70.918,24.422 h4
  text "V2" at 51.504,23.546 h1.2
  text "Load-" at 9.701,13.3 h1.2
  text "Load+" at 21.201,13.3 h1.2
  text "Batt+" at 62.901,13.3 h1.2
  text "Batt-" at 74.401,13.3 h1.2
Bottom Overlay:
  drawing of 19 lines, arcs and shapes, not listed
  text "Russell" at 72.32,73.4 h1.2
  text "MIL" at 84.177,73.4 h1.2
  text "MacGregor" at 73.719,71.6 h1.2
  text "Fall '25" at 86.876,71.3 h1.2
  text "+3V3" at 9.885,63.5 h1
  text "GND" at 89.78,62.58 h1
  text "RXD" at 89.78,60.04 h1
  text "GND" at 8.886,58.42 h1
  text "TXD" at 89.78,57.5 h1
  text "FlashSS" at 34.249,47.2 h1
  text "QSPI_SS" at 41.948,44.795 h1
  text "GPIO0" at 39.949,42.045 h1
  text "3V3" at 28.694,41.083 h1 r90
  text "PNAR" at 36.321,34.5 h1
  text "USBGND-GND" at 19.709,32.52 h1
  text "+5V" at 8.886,27.5 h1
  text "Board" at 84.75,22.55 h1.2
  text "+5V" at 8.886,22.42 h1
  text "Dim" at 84.75,20.75 h1.2
  text "82.5mm" at 86.75,20.326 h1.2 r270
  text "97mm" at 84.074,17.55 h1.2
  text "GND" at 8.886,17.34 h1
  text "Load-" at 15.299,13.3 h1.2
  text "Load+" at 26.799,13.3 h1.2
  text "Batt+" at 68.099,13.3 h1.2
  text "Batt-" at 79.599,13.3 h1.2
  text "GND" at 8.886,12.26 h1
  text "M3.5" at 86.25,3.9 h1.2

## Text inside footprints (layer, text, board x,y; h text height)
C1: Top Overlay "+" at 88.317,15.001 h1.3
C7: Bottom Overlay "+" at 71.742,43.934 h1.5 r90
SEG1: Top Overlay "D1" at 43.547,73.382 h1.2 r45; Top Overlay "A" at 46.369,73.948 h1.2 r45; Top Overlay "F" at 48.909,73.948 h1.2 r45; Top Overlay "D2" at 51.025,73.1 h1.2 r45; Top Overlay "D3" at 53.565,73.1 h1.2 r45; Top Overlay "B" at 56.529,73.948 h1.2 r45; Top Overlay "4-Digit 7seg Display" at 35.918,65.286 h1.5; Top Overlay "E" at 43.829,56.21 h1.2 r45; Top Overlay "D" at 46.369,56.21 h1.2 r45; Top Overlay "DP" at 48.485,56.21 h1.2 r45; Top Overlay "C" at 51.449,56.21 h1.2 r45; Top Overlay "G" at 53.989,56.21 h1.2 r45; Top Overlay "D4" at 56.105,56.21 h1.2 r45; Top Overlay "(Common Cathode)" at 41.041,62.186 h1.2
T1: Top Overlay "2-Pin Screw / Term" at 5.595,66.032 h0.75 r270; Top Overlay "[Front]" at 0.708,65.882 h0.75 r270
T2: Top Overlay "[Front]" at 0.708,29.882 h0.75 r270; Top Overlay "4-Pin Screw Term" at 6.931,29.882 h0.75 r270
X2: Top Overlay "Port" at 0.95,46.799 h1.2 r270